# EAGLE board Beton Ajek (EAGLE 9.6.2)
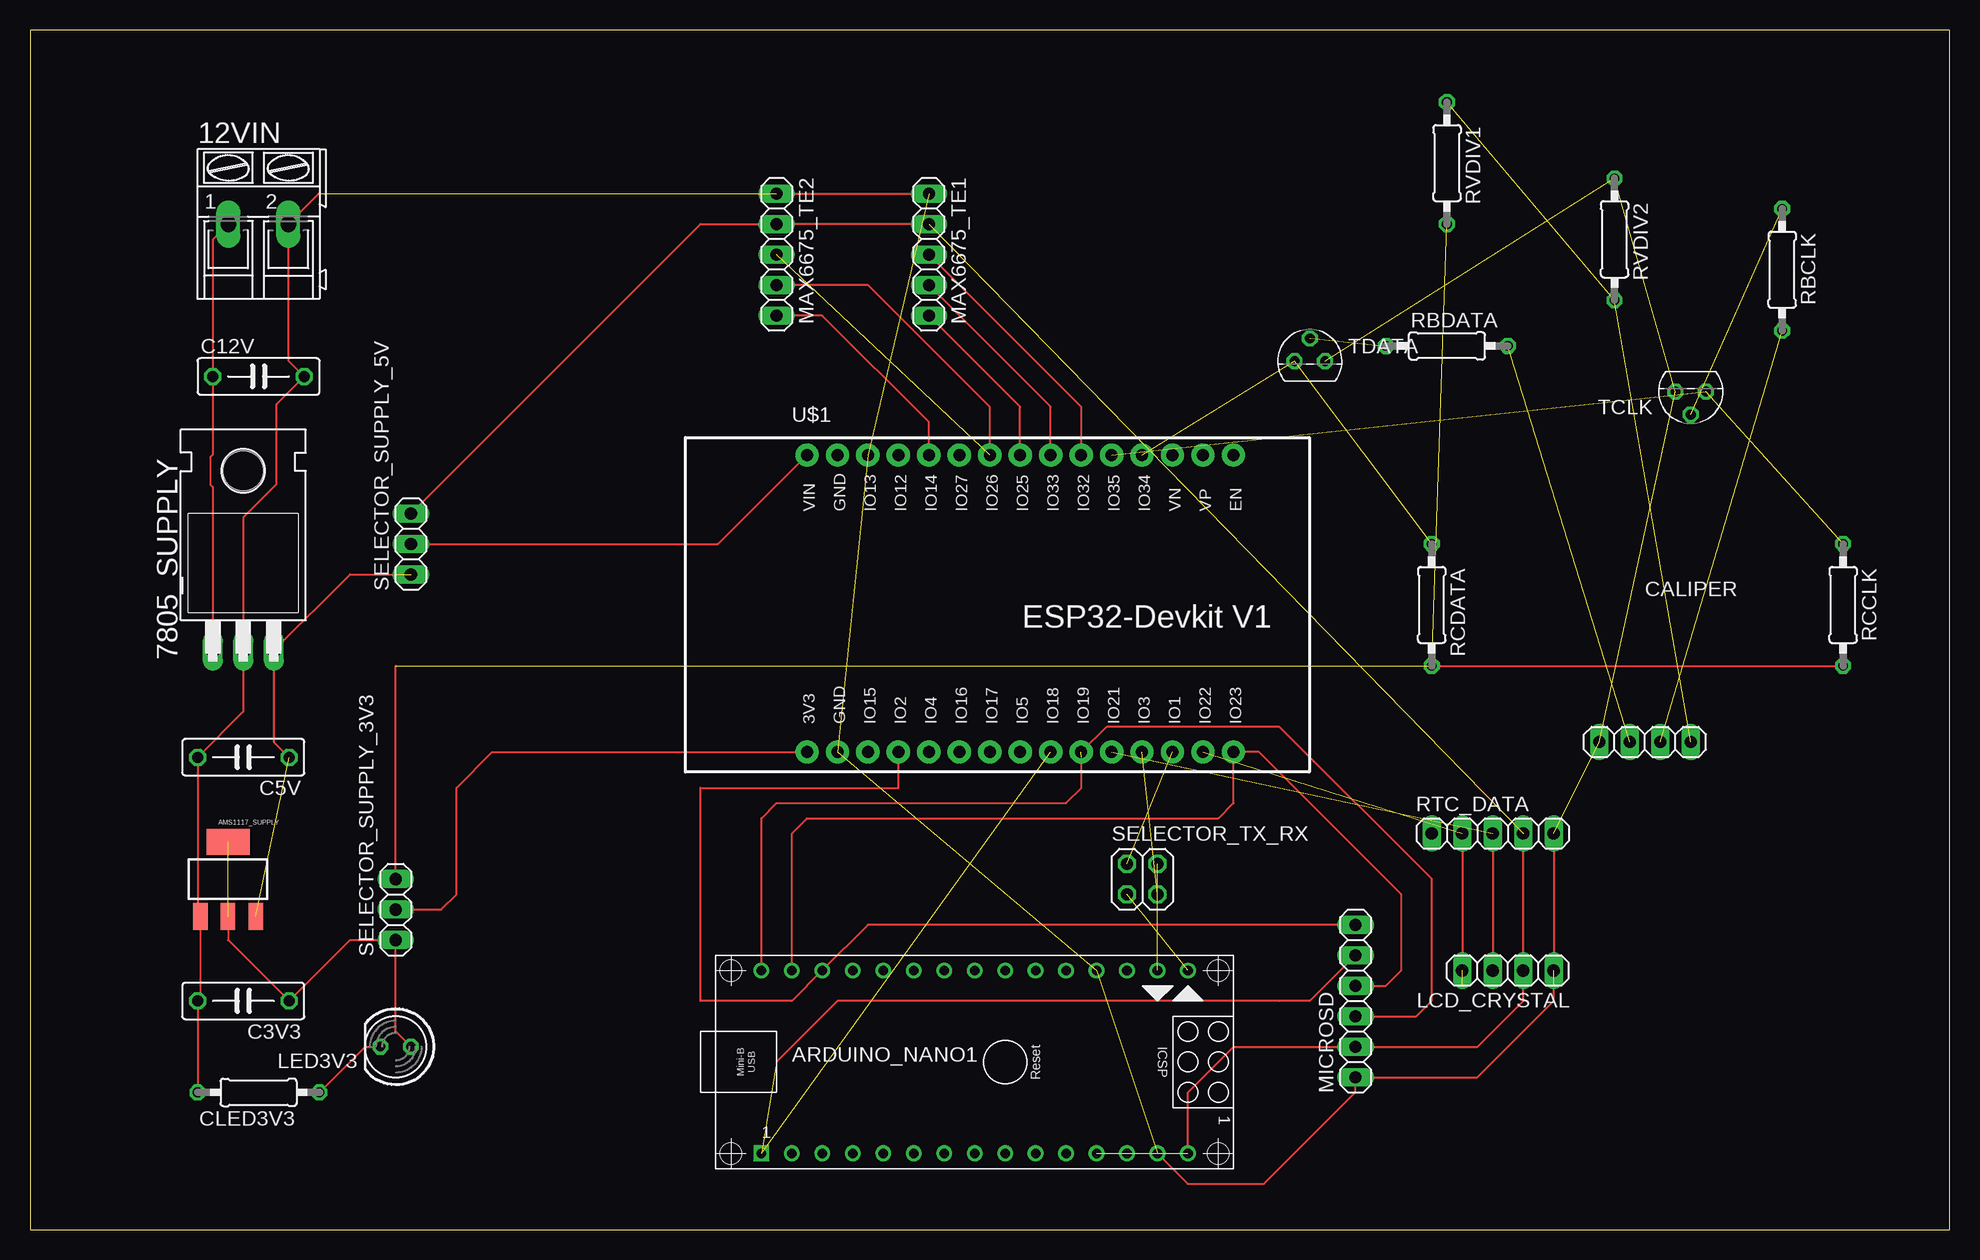
[diagram p0: board, top side]

Size 160 x 100 mm. Coordinates in mm from the lower left corner, seen from the top.
Outline: 0,0 160,0 160,100 0,100 0,0
Copper layers (1*16): Top 0.035mm / dielectric 1.5mm / Bottom 0.035mm
Design rules "default": minimum track width 6mil, minimum drill 0.35mm, track to track 6mil, track to pad 6mil, pad to pad 6mil, via to via 6mil, smd to smd 6mil, copper to edge 40mil, drill to drill 6mil, minimum pad ring 10mil, minimum via ring 8mil, stop-mask expansion 4mil, vias tented up to drill 0mil, thermal gap 10mil

## Footprints (pad centres in the part's own frame; a part is rotated, then mirrored left to right if it is on the bottom)
AK300/2 = drill 1.321 long: 1 -2.515,0; 2 2.489,0
TO220H = drill 1.118 long: 1 -2.54,-10.16; 2 0,-10.16; 3 2.54,-10.16 | hole 3.302: 0,4.826
SOT223 = smd 1.219 x 2.235: 1 -2.311,-3.099; 2 0,-3.099; 3 2.311,-3.099 | smd 3.6 x 2.2: 4 0,3.099
ARDUINO_NANO = drill 0.8 square: 1 -20.32,-7.62 | drill 0.8: 2 -17.78,-7.62; 3 -15.24,-7.62; 4 -12.7,-7.62; 5 -10.16,-7.62; 6 -7.62,-7.62; 7 -5.08,-7.62; 8 -2.54,-7.62; 9 0,-7.62; 10 2.54,-7.62; 11 5.08,-7.62; 12 7.62,-7.62; 13 10.16,-7.62; 14 12.7,-7.62; 15 15.24,-7.62; 16 15.24,7.62; 17 12.7,7.62; 18 10.16,7.62; 19 7.62,7.62; 20 5.08,7.62; 21 2.54,7.62; 22 0,7.62; 23 -2.54,7.62; 24 -5.08,7.62; 25 -7.62,7.62; 26 -10.16,7.62; 27 -12.7,7.62; 28 -15.24,7.62; 29 -17.78,7.62; 30 -20.32,7.62 | hole 1.778: -22.86,-7.62; -22.86,7.62; 17.78,7.62; 17.78,-7.62
C075-032X103 = drill 0.914 octagon: 1 -3.81,0; 2 3.81,0
1X04 = drill 1.016 long: 1 -3.81,0; 2 -1.27,0; 3 1.27,0; 4 3.81,0
0207/10 = drill 0.813 octagon: 1 -5.08,0; 2 5.08,0
LED5MM = drill 0.813 octagon: A -1.27,0; K 1.27,0
1X05 = drill 1.016 long: 1 -5.08,0; 2 -2.54,0; 3 0,0; 4 2.54,0; 5 5.08,0
1X06 = drill 1.016 long: 1 -6.35,0; 2 -3.81,0; 3 -1.27,0; 4 1.27,0; 5 3.81,0; 6 6.35,0
1X07 = drill 1.016 long: 1 -7.62,0; 2 -5.08,0; 3 -2.54,0; 4 0,0; 5 2.54,0; 6 5.08,0; 7 7.62,0
1X03 = drill 1.016 long: 1 -2.54,0; 2 0,0; 3 2.54,0
2X02 = drill 1.016 octagon: 1 -1.27,-1.27; 2 -1.27,1.27; 3 1.27,-1.27; 4 1.27,1.27
TO92 = drill 0.813 octagon: 1 1.27,0; 2 0,1.905; 3 -1.27,0
ESP32-DEVKITV1 = drill 1 pad 1.93: 1 -22.87,-13.54; 2 -20.33,-13.54; 3 -17.79,-13.54; 4 -15.25,-13.54; 5 -12.71,-13.54; 6 -10.17,-13.54; 7 -7.63,-13.54; 8 -5.09,-13.54; 9 -2.55,-13.54; 10 -0.01,-13.54; 11 2.53,-13.54; 12 5.07,-13.54; 13 7.61,-13.54; 14 10.15,-13.54; 15 12.69,-13.54; 16 12.69,11.23; 17 10.15,11.23; 18 7.61,11.23; 19 5.07,11.23; 20 2.53,11.23; 21 -0.01,11.23; 22 -2.55,11.23; 23 -5.09,11.23; 24 -7.63,11.23; 25 -10.17,11.23; 26 -12.71,11.23; 27 -15.25,11.23; 28 -17.79,11.23; 29 -20.33,11.23; 30 -22.87,11.23

## Placement (x,y rotation side)
12VIN  [AK300/2]  19.05,83.82 0 top
7805_SUPPLY  7805T  [TO220H]  17.78,58.42 0 top
AMS1117_SUPPLY  [SOT223]  16.51,29.21 0 top
ARDUINO_NANO1  [ARDUINO_NANO]  81.28,13.97 0 top
C3V3  [C075-032X103]  17.78,19.05 180 top
C5V  [C075-032X103]  17.78,39.37 180 top
C12V  [C075-032X103]  19.05,71.12 0 top
CALIPER  [1X04]  134.62,40.64 180 top
CLED3V3  [0207/10]  19.05,11.43 180 top
LCD_CRYSTAL  [1X04]  123.19,21.59 180 top
LED3V3  [LED5MM]  30.48,15.24 180 top
MAX6675_TE1  [1X05]  74.93,81.28 270 top
MAX6675_TE2  [1X05]  62.23,81.28 270 top
MICROSD  [1X06]  110.49,19.05 90 top
RBCLK  [0207/10]  146.05,80.01 270 top
RBDATA  [0207/10]  118.11,73.66 0 top
RCCLK  [0207/10]  151.13,52.07 270 top
RCDATA  [0207/10]  116.84,52.07 270 top
RTC_DATA  [1X05]  121.92,33.02 0 top
RTC_PENJEPIT  [1X07]  -31.75,85.09 0 top  (outside the outline)
RVDIV1  [0207/10]  118.11,88.9 270 top
RVDIV2  [0207/10]  132.08,82.55 270 top
SELECTOR_SUPPLY_3V3  [1X03]  30.48,26.67 90 top
SELECTOR_SUPPLY_5V  [1X03]  31.75,57.15 90 top
SELECTOR_TX_RX  [2X02]  92.71,29.21 0 top
TCLK  BC547  [TO92]  138.43,69.85 180 top
TDATA  BC547  [TO92]  106.68,72.39 0 top
U$1  ESP32DEVKITV1  [ESP32-DEVKITV1]  87.63,53.34 0 top

## Library data of the parts
12VIN = con-ptr500
7805_SUPPLY = adafruit
AMS1117_SUPPLY = SparkFun-IC-Power; PROD_ID: VREG-08170
ARDUINO_NANO1 = ArduinoNanoV30
C3V3 C5V C12V = rcl; SPICEPREFIX: C
CALIPER LCD_CRYSTAL MAX6675_TE1 MAX6675_TE2 MICROSD RTC_DATA RTC_PENJEPIT SELECTOR_SUPPLY_3V3 SELECTOR_SUPPLY_5V SELECTOR_TX_RX = pinhead
CLED3V3 RBCLK RBDATA RCCLK RCDATA RVDIV1 RVDIV2 = rcl; SPICEPREFIX: R
LED3V3 = led
TCLK TDATA = transistor
U$1 = ESP32-DEVKITV1

## Nets
1V5: CALIPER.1 RVDIV1.1 RVDIV2.2
3V3: RCCLK.2 RCDATA.2 RVDIV1.2 SELECTOR_SUPPLY_3V3.3
3V3_ESP: SELECTOR_SUPPLY_3V3.2 U$1.1
3V3_SUPPLY: AMS1117_SUPPLY.2 AMS1117_SUPPLY.4 C3V3.1 LED3V3.A SELECTOR_SUPPLY_3V3.1
5V: ARDUINO_NANO1.12 ARDUINO_NANO1.15 LCD_CRYSTAL.2 MAX6675_TE1.2 MAX6675_TE2.2 MICROSD.2 RTC_DATA.4 SELECTOR_SUPPLY_5V.3
5V_ESP: SELECTOR_SUPPLY_5V.2 U$1.30
5V_SUPPLY: 7805_SUPPLY.3 AMS1117_SUPPLY.3 C5V.1 SELECTOR_SUPPLY_5V.1
CHIP_SELECT_USD: ARDUINO_NANO1.28 MICROSD.6 U$1.4
CLK_CALIPER: RCCLK.1 TCLK.3 U$1.20
CLK_IN: CALIPER.2 RBCLK.2
CS_TE1: MAX6675_TE1.4 U$1.22
CS_TE2: MAX6675_TE2.4 U$1.24
DATA_CALIPER: RCDATA.1 TDATA.3 U$1.19
DATA_IN: CALIPER.3 RBDATA.2
GND: 12VIN.2 7805_SUPPLY.2 AMS1117_SUPPLY.1 ARDUINO_NANO1.14 ARDUINO_NANO1.19 C3V3.2 C5V.2 C12V.2 CALIPER.4 CLED3V3.2 LCD_CRYSTAL.1 MAX6675_TE1.1 MAX6675_TE2.1 MICROSD.1 RTC_DATA.5 RVDIV2.1 TCLK.1 TDATA.1 U$1.2 U$1.28
MISO_USD: ARDUINO_NANO1.30 MICROSD.3 U$1.10
MOSI_USD: ARDUINO_NANO1.29 MICROSD.4 U$1.15
N$1: 12VIN.1 7805_SUPPLY.1 C12V.1
N$2: RBCLK.1 TCLK.2
N$4: U$1.28
N$5: U$1.27
N$6: U$1.5
N$13: CLED3V3.1 LED3V3.K
N$14: U$1.18
N$15: U$1.17
N$16: U$1.16
N$18: RBDATA.1 TDATA.2
N$22: U$1.6
N$23: U$1.7
N$24: U$1.8
N$52: RTC_DATA.1
RX_ESP: SELECTOR_TX_RX.3 U$1.12
RX_NANO: ARDUINO_NANO1.17 SELECTOR_TX_RX.4
SCK_TE1: MAX6675_TE1.3 U$1.21
SCK_TE2: MAX6675_TE2.3 U$1.24
SCK_USD: ARDUINO_NANO1.1 MICROSD.5 U$1.9
SCL: LCD_CRYSTAL.4 RTC_DATA.2 U$1.14
SDA: LCD_CRYSTAL.3 RTC_DATA.3 U$1.11
SO_TE1: MAX6675_TE1.5 U$1.23
SO_TE2: MAX6675_TE2.5 U$1.26
TX_ESP: SELECTOR_TX_RX.2 U$1.13
TX_NANO: ARDUINO_NANO1.16 SELECTOR_TX_RX.1

## Tracks (layer width: path | path; a pad name or v marks a point on that pad's centre or on a via)
1V5  (2 unrouted)
3V3  (2 unrouted)
  Top 0.152: SELECTOR_SUPPLY_3V3.3 30.48,46.99 | RCDATA.2 RCCLK.2
3V3_ESP
  Top 0.152: SELECTOR_SUPPLY_3V3.2 34.29,26.67 35.56,27.94 35.56,36.83 38.53,39.8 U$1.1
3V3_SUPPLY  (1 unrouted)
  Top 0.152: AMS1117_SUPPLY.2 16.51,24.13 C3V3.1 26.67,24.13 SELECTOR_SUPPLY_3V3.1 30.48,16.51 LED3V3.A
5V  (2 unrouted)
  Top 0.152: SELECTOR_SUPPLY_5V.3 55.88,83.82 MAX6675_TE2.2 MAX6675_TE1.2 | RTC_DATA.4 LCD_CRYSTAL.2 124.46,19.05 120.65,15.24 MICROSD.2 100.33,15.24 96.52,11.43 ARDUINO_NANO1.15
5V_ESP
  Top 0.152: SELECTOR_SUPPLY_5V.2 57.34,57.15 U$1.30
5V_SUPPLY  (2 unrouted)
  Top 0.152: C5V.1 20.32,40.64 7805_SUPPLY.3 26.67,54.61 30.48,54.61
CHIP_SELECT_USD
  Top 0.152: U$1.4 72.39,36.83 55.88,36.83 55.88,19.05 63.5,19.05 ARDUINO_NANO1.28 69.85,25.4 MICROSD.6
CLK_CALIPER  (2 unrouted)
CLK_IN  (1 unrouted)
CS_TE1
  Top 0.152: U$1.22 85.08,68.57 85.09,68.58 MAX6675_TE1.4
CS_TE2
  Top 0.152: U$1.24 80,68.57 80.01,68.58 69.85,78.74 MAX6675_TE2.4
DATA_CALIPER  (2 unrouted)
DATA_IN  (1 unrouted)
GND  (10 unrouted)
  Top 0.152: CLED3V3.2 C3V3.2 14.2,19.28 AMS1117_SUPPLY.1 13.97,26.34 C5V.2 17.78,43.18 7805_SUPPLY.2 17.78,59.37 20.52,62.11 20.52,68.78 C12V.2 21.54,72.44 12VIN.2 24.08,86.36 | MAX6675_TE2.1 MAX6675_TE1.1 | RTC_DATA.5 LCD_CRYSTAL.1 | 127,20.32 127,19.05 120.65,12.7 MICROSD.1 110.49,11.43 102.87,3.81 96.52,3.81 ARDUINO_NANO1.14
MISO_USD  (1 unrouted)
  Top 0.152: MICROSD.3 115.57,17.78 116.84,19.05 116.84,29.21 104.14,41.91 89.73,41.91 U$1.10 | ARDUINO_NANO1.30 60.96,34.29 62.23,35.56 86.36,35.56 87.63,36.83 87.63,39.37
MOSI_USD
  Top 0.152: MICROSD.4 113.03,20.32 114.3,21.59 114.3,27.94 102.44,39.8 U$1.15 | U$1.15 | ARDUINO_NANO1.29 63.5,33.02 64.77,34.29 99.06,34.29 100.33,35.56 U$1.15
N$1  (1 unrouted)
  Top 0.152: 12VIN.1 15.24,82.53 C12V.1 15.24,64.58 15.04,64.38 15.04,62.11 15.24,61.91 15.24,49.53
N$2  (1 unrouted)
N$13
  Top 0.152: CLED3V3.1 27.94,15.24 LED3V3.K
N$18  (1 unrouted)
RX_ESP  (1 unrouted)
RX_NANO  (1 unrouted)
SCK_TE1
  Top 0.152: MAX6675_TE1.3 87.62,68.59 U$1.21
SCK_TE2  (1 unrouted)
SCK_USD  (2 unrouted)
  Top 0.152: MICROSD.5 106.68,19.05 104.14,19.05 67.31,19.05 62.23,13.97
SCL  (2 unrouted)
  Top 0.152: RTC_DATA.2 119.38,20.32
SDA  (1 unrouted)
  Top 0.152: RTC_DATA.3 LCD_CRYSTAL.3
SO_TE1
  Top 0.152: U$1.23 82.54,68.57 82.55,68.58 MAX6675_TE1.5
SO_TE2
  Top 0.152: 63.5,76.2 MAX6675_TE2.5 66.04,76.2 74.93,67.31 74.92,67.3 U$1.26 74.92,64.78
TX_ESP  (1 unrouted)
TX_NANO  (1 unrouted)